# EAGLE board cable 2 (EAGLE 7.6.0)
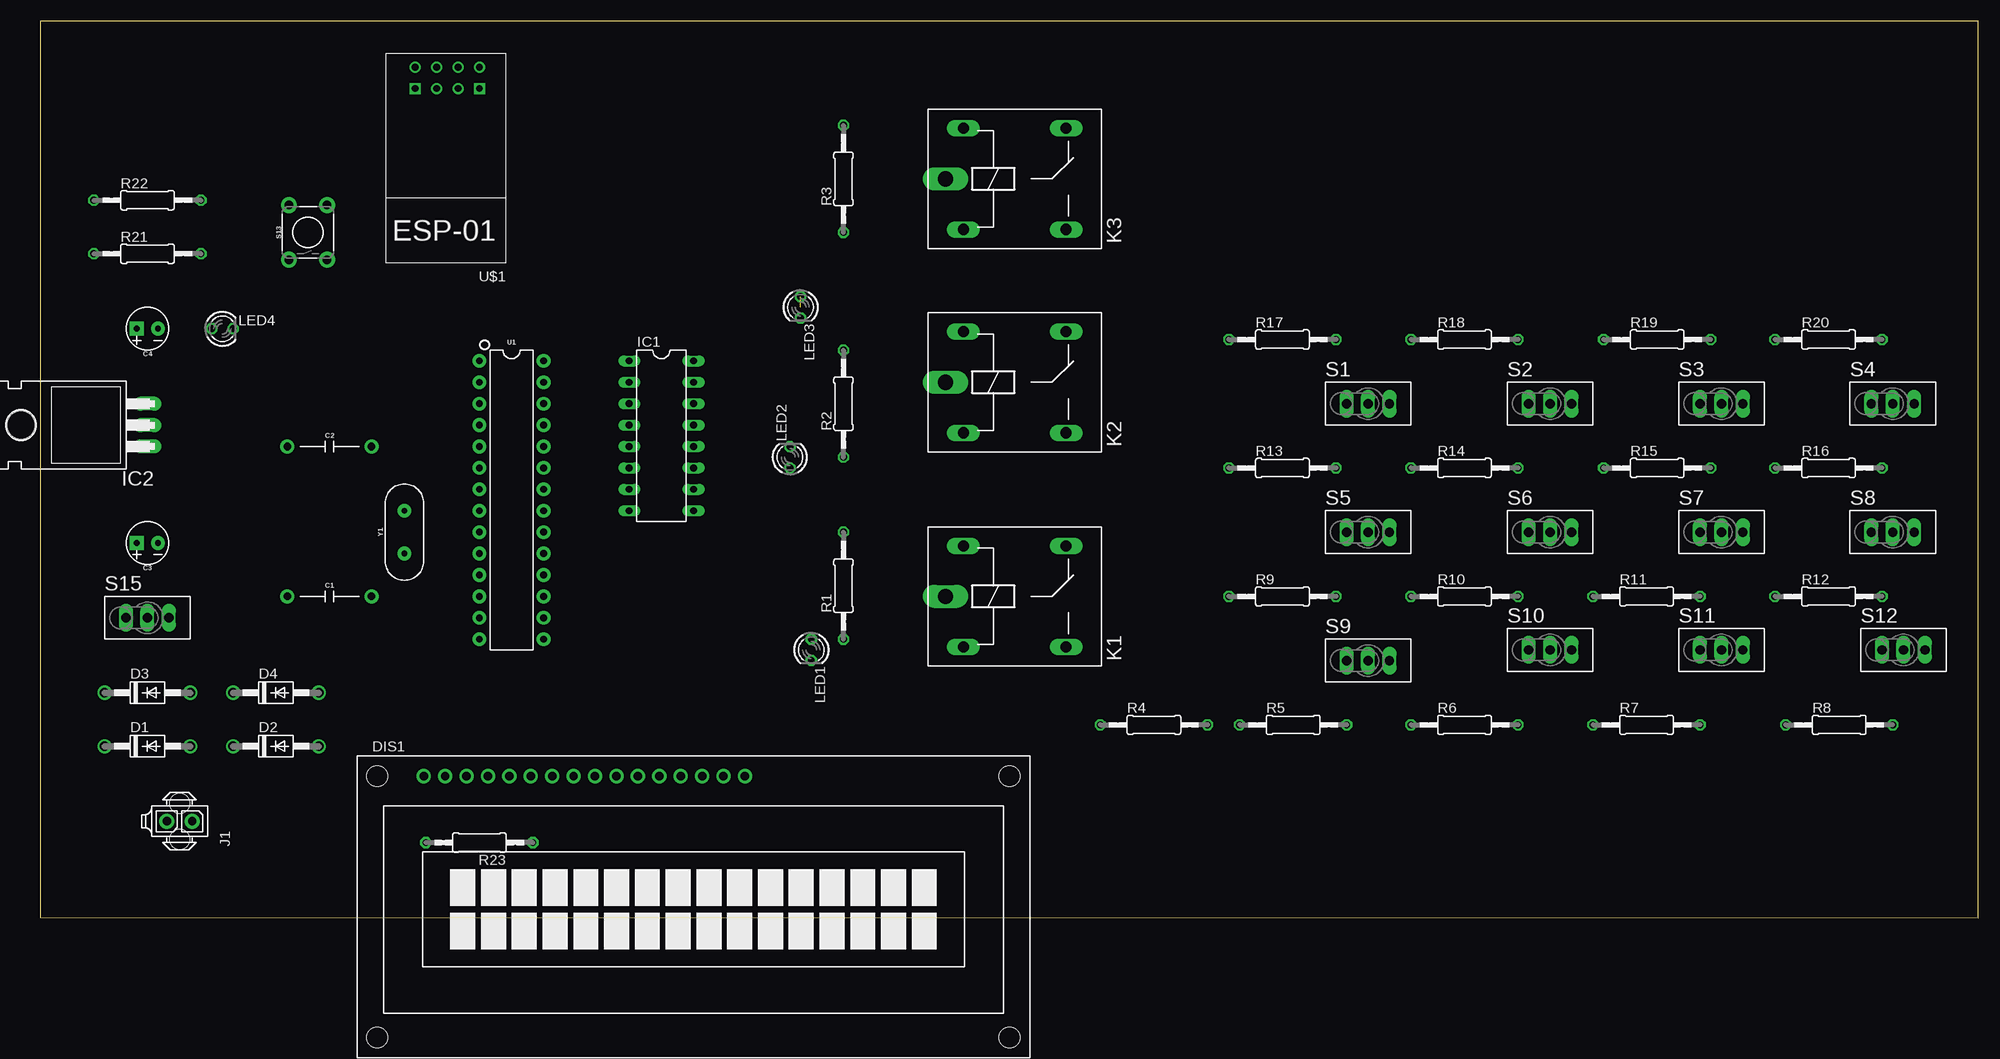
[diagram p0: board, top side]
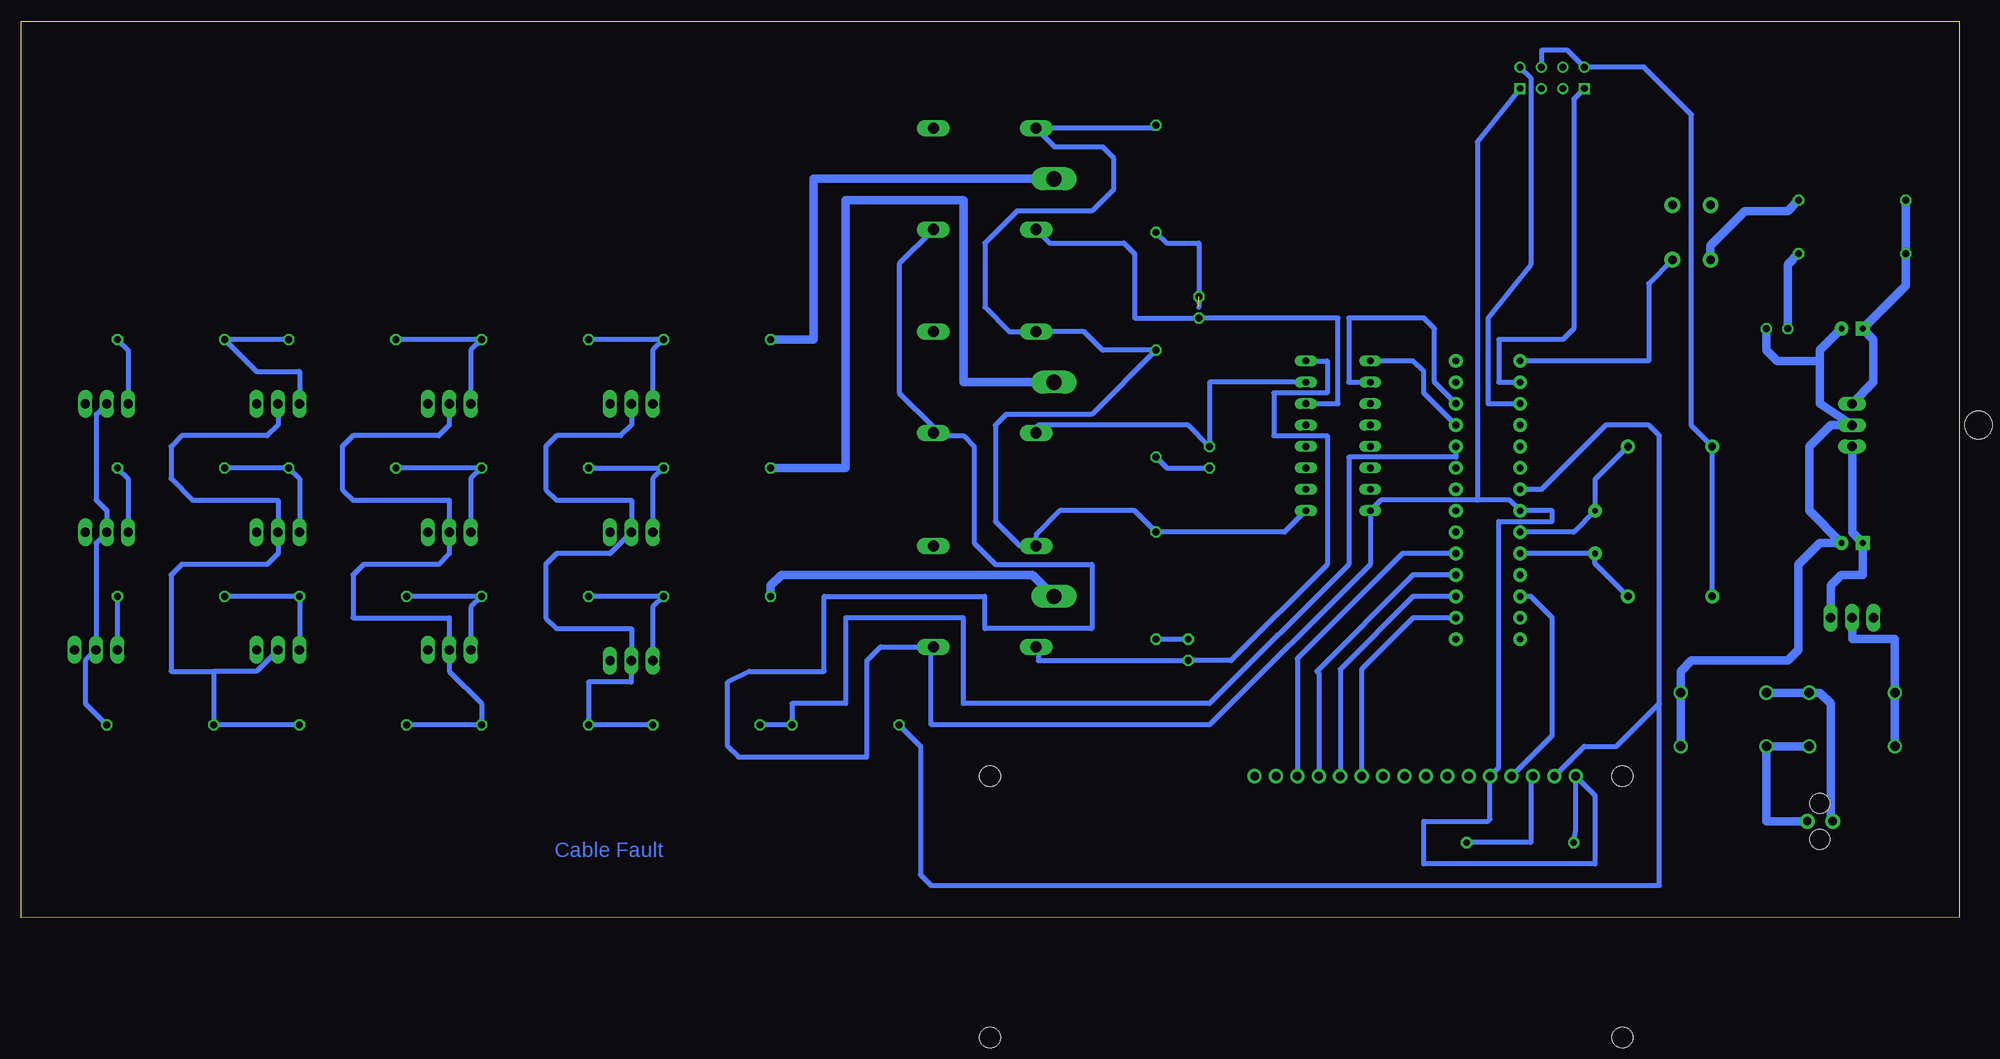
[diagram p1: board, bottom side, seen from below]

Size 229.87 x 106.37 mm. Coordinates in mm from the lower left corner, seen from the top.
Outline: 0,0.02 229.87,0 229.85,106.37 0,106.37 0,0.02
Copper layers (1*16): Top 0.035mm / dielectric 1.5mm / Bottom 0.035mm
Design rules "default": minimum track width 10mil, minimum drill 24mil, track to track 8mil, track to pad 8mil, pad to pad 8mil, via to via 8mil, smd to smd 8mil, copper to edge 40mil, drill to drill 8mil, minimum pad ring 10mil, minimum via ring 8mil, stop-mask expansion 4mil, vias tented up to drill 0mil, thermal gap 10mil

## Footprints (pad centres in the part's own frame; a part is rotated, then mirrored left to right if it is on the bottom)
CAP-PTH-10MM = drill 0.9 pad 1.651: 1 -5,0; 2 5,0
CPOL-RADIAL-2.5MM-5MM-KIT = drill 0.7 pad 1.651 square: 1 1.25,0 | drill 0.7 pad 1.651: 2 -1.25,0
DO41-10 = drill 1.118: A 5.08,0; C -5.08,0
TUXGR_16X2_R2 = drill 1 pad 1.676: 1 -32,15.5; 2 -29.46,15.5; 3 -26.92,15.5; 4 -24.38,15.5; 5 -21.84,15.5; 6 -19.3,15.5; 7 -16.76,15.5; 8 -14.22,15.5; 9 -11.68,15.5; 10 -9.14,15.5; 11 -6.6,15.5; 12 -4.06,15.5; 13 -1.52,15.5; 14 1.02,15.5; 15 3.56,15.5; 16 6.1,15.5 | hole 2.5: -37.5,-15.5; 37.5,-15.5; -37.5,15.5; 37.5,15.5
DIL16 = drill 0.813 long: 1 -8.89,-3.81; 2 -6.35,-3.81; 3 -3.81,-3.81; 4 -1.27,-3.81; 5 1.27,-3.81; 6 3.81,-3.81; 7 6.35,-3.81; 8 8.89,-3.81; 9 8.89,3.81; 10 6.35,3.81; 11 3.81,3.81; 12 1.27,3.81; 13 -1.27,3.81; 14 -3.81,3.81; 15 -6.35,3.81; 16 -8.89,3.81
TO220H = drill 1.118 long: 1 -2.54,-10.16; 2 0,-10.16; 3 2.54,-10.16 | hole 3.302: 0,4.826
794681-2 = drill 1 pad 1.778: 1 0,-1.5; 2 0,1.5 | hole 2.4: 2.13,0; -2.17,0
ZF112 = drill 1.321 long: 1 -6.096,5.994; 2 -6.096,-5.994; O 6.096,5.994; S 6.096,-5.994 | drill 1.803 long: P -8.204,0
LED3MM = drill 0.813 octagon: A -1.27,0; K 1.27,0
0207/12 = drill 0.813 octagon: 1 -6.35,0; 2 6.35,0
TL3XPO = drill 1.1 pad 1.422 long: 1 -2.54,0; 2 0,0; 3 2.54,0
TACTILE_SWITCH_PTH_6.0MM_KIT = drill 1.016 pad 1.88: 1 -3.251,2.261; 2 3.251,2.261; 3 -3.251,-2.261; 4 3.251,-2.261
DIP28 = drill 0.813 pad 1.626: 1 -16.51,-3.81; 2 -13.97,-3.81; 3 -11.43,-3.81; 4 -8.89,-3.81; 5 -6.35,-3.81; 6 -3.81,-3.81; 7 -1.27,-3.81; 8 1.27,-3.81; 9 3.81,-3.81; 10 6.35,-3.81; 11 8.89,-3.81; 12 11.43,-3.81; 13 13.97,-3.81; 14 16.51,-3.81; 15 16.51,3.81; 16 13.97,3.81; 17 11.43,3.81; 18 8.89,3.81; 19 6.35,3.81; 20 3.81,3.81; 21 1.27,3.81; 22 -1.27,3.81; 23 -3.81,3.81; 24 -6.35,3.81; 25 -8.89,3.81; 26 -11.43,3.81; 27 -13.97,3.81; 28 -16.51,3.81
ESP01 = drill 0.8: CH_PD -1.285,-8.178; GPIO0 1.255,-5.638; GPIO2 -1.285,-5.638; RST 1.255,-8.178; TX -3.825,-8.178; VCC 3.795,-8.178 | drill 0.8 square: GND -3.825,-5.638; RX 3.795,-5.638
HC49US = drill 0.7 pad 1.651: 1 -2.54,0; 2 2.54,0

## Placement (x,y rotation side)
C1  10nF  [CAP-PTH-10MM]  34.29,38.12 0 top
C2  10nF  [CAP-PTH-10MM]  34.29,55.9 0 top
C3  10uF  [CPOL-RADIAL-2.5MM-5MM-KIT]  12.7,44.47 180 top
C4  10uF  [CPOL-RADIAL-2.5MM-5MM-KIT]  12.7,69.87 180 top
D1  1N4004  [DO41-10]  12.7,20.34 0 top
D2  1N4004  [DO41-10]  27.94,20.34 0 top
D3  1N4004  [DO41-10]  12.7,26.69 0 top
D4  1N4004  [DO41-10]  27.94,26.69 0 top
DIS1  TUXGR_16X2_R2  [TUXGR_16X2_R2]  77.47,1.29 0 top
IC1  ULN2004AN  [DIL16]  73.66,57.17 270 top
IC2  7812T  [TO220H]  2.54,58.44 90 top
J1  794681-2  [794681-2]  16.51,11.45 90 top
K1  ZF112  [ZF112]  115.57,38.12 0 top
K2  ZF112  [ZF112]  115.57,63.52 0 top
K3  ZF112  [ZF112]  115.57,87.65 0 top
LED1  TLLR4400  [LED3MM]  91.44,31.77 270 top
LED2  TLLR4400  [LED3MM]  88.9,54.63 90 top
LED3  TLLR4400  [LED3MM]  90.17,72.41 270 top
LED4  TLLR4400  [LED3MM]  21.59,69.87 0 top
R1  [0207/12]  95.25,39.39 90 top
R2  [0207/12]  95.25,60.98 90 top
R3  [0207/12]  95.25,87.65 90 top
R4  [0207/12]  132.08,22.88 0 top
R5  [0207/12]  148.59,22.88 0 top
R6  [0207/12]  168.91,22.88 0 top
R7  [0207/12]  190.5,22.88 0 top
R8  [0207/12]  213.36,22.88 0 top
R9  [0207/12]  147.32,38.12 0 top
R10  [0207/12]  168.91,38.12 0 top
R11  [0207/12]  190.5,38.12 0 top
R12  [0207/12]  212.09,38.12 0 top
R13  [0207/12]  147.32,53.36 0 top
R14  [0207/12]  168.91,53.36 0 top
R15  [0207/12]  191.77,53.36 0 top
R16  [0207/12]  212.09,53.36 0 top
R17  [0207/12]  147.32,68.6 0 top
R18  [0207/12]  168.91,68.6 0 top
R19  [0207/12]  191.77,68.6 0 top
R20  [0207/12]  212.09,68.6 0 top
R21  [0207/12]  12.7,78.76 0 top
R22  [0207/12]  12.7,85.11 0 top
R23  [0207/12]  52.07,8.91 180 top
S1  TL36PO  [TL3XPO]  157.48,60.98 0 top
S2  TL36PO  [TL3XPO]  179.07,60.98 0 top
S3  TL36PO  [TL3XPO]  199.39,60.98 0 top
S4  TL36PO  [TL3XPO]  219.71,60.98 0 top
S5  TL36PO  [TL3XPO]  157.48,45.74 0 top
S6  TL36PO  [TL3XPO]  179.07,45.74 0 top
S7  TL36PO  [TL3XPO]  199.39,45.74 0 top
S8  TL36PO  [TL3XPO]  219.71,45.74 0 top
S9  TL36PO  [TL3XPO]  157.48,30.5 0 top
S10  TL36PO  [TL3XPO]  179.07,31.77 0 top
S11  TL36PO  [TL3XPO]  199.39,31.77 0 top
S12  TL36PO  [TL3XPO]  220.98,31.77 0 top
S13  MOMENTARY-SWITCH-SPST-PTH-6.0MM-KIT  [TACTILE_SWITCH_PTH_6.0MM_KIT]  31.75,81.3 90 top
S15  TL37PO  [TL3XPO]  12.7,35.58 0 top
U1  328P  [DIP28]  55.88,49.55 270 top
U$1  ESP01  [ESP01]  48.26,92.73 180 top
Y1  16MHz  [HC49US]  43.18,45.74 90 top

## Library data of the parts
C1 C2 = SparkFun-Capacitors; PROD_ID: CAP-09321
C3 C4 = SparkFun-Capacitors; PROD_ID: CAP-08440
D1-D4 = diode
DIS1 = display-lcd; OC_FARNELL: unknown; OC_NEWARK: unknown
IC1 = uln-udn
IC2 = linear
J1 = con-amp
K1-K3 = relay; OC_FARNELL: unknown; OC_NEWARK: unknown
LED1-LED4 = led; MF: VISHAY SEMICONDUCTOR; OC_FARNELL: 1612437
R1-R23 = rcl
S1-S12 S15 = switch
S13 = SparkFun-Switches; PROD_ID: SWCH-08441; SF_SKU: COM-00097
U1 = SparkFun-IC-Microcontroller; PROD_ID: IC-09136
U$1 = esp8266modules
Y1 = SparkFun-Clocks; PROD_ID: XTAL-08181; SF_ID: COM-00536

## Nets
3.3V: C1.1 C2.1 U$1.CH_PD U$1.VCC
5V: DIS1.2 R4.1 U1.7
12V: IC1.9 K1.1 K2.1 K3.1 R1.2 R2.2 R3.2
GND: DIS1.1 DIS1.5 IC1.8 K1.S K2.S K3.S R23.2 U1.8 U$1.GND
N$1: DIS1.3 R23.1
N$2: R16.2 S8.1
N$3: C2.2 U1.9 Y1.2
N$4: C1.2 U1.10 Y1.1
N$5: LED4.A R21.2
N$6: C3.2 C4.2 D2.A D4.A IC2.2 LED4.K
N$7: C4.1 IC2.3 R21.1 R22.1
N$8: R22.2 S13.1
N$9: S13.3 U1.1
N$10: D3.A D4.C J1.2
N$11: C3.1 IC2.1 S15.3
N$12: U1.3 U$1.TX
N$13: DIS1.11 U1.16
N$14: DIS1.12 U1.17
N$15: DIS1.13 U1.18
N$16: U1.2 U$1.RX
N$17: DIS1.14 U1.19
N$18: DIS1.6
N$19: DIS1.4 U1.12
N$20: LED1.A R1.1
N$21: IC1.16 K1.2 LED1.K
N$22: IC1.15 K2.2 LED2.K
N$23: LED2.A R2.1
N$24: IC1.14 K3.2 LED3.K
N$25: LED3.A R3.1
N$26: IC1.1 U1.25
N$27: IC1.2 U1.26
N$28: K1.P R9.1
N$29: R4.2 R5.1 U1.24
N$30: R8.2 S4.2 S8.2 S12.2
N$31: R5.2 R6.1 S1.2 S5.2 S9.2
N$32: K2.P R13.1
N$33: K3.P R17.1
N$34: R17.2 R18.1 S1.1
N$35: R18.2 R19.1 S2.1
N$36: R19.2 R20.1 S3.1
N$37: R13.2 R14.1 S5.1
N$38: R14.2 R15.1 S6.1
N$39: R15.2 R16.1 S7.1
N$40: R9.2 R10.1 S9.1
N$41: R10.2 R11.1 S10.1
N$42: R11.2 R12.1 S11.1
N$43: R6.2 R7.1 S2.2 S6.2 S10.2
N$44: R7.2 R8.1 S3.2 S7.2 S11.2
N$45: R20.2 S4.1
N$47: R12.2 S12.1
N$48: IC1.3
N$49: D1.C D3.C S15.2
N$50: D1.A D2.C J1.1

## Tracks (layer width: path | path; a pad name or v marks a point on that pad's centre or on a via)
3.3V
  Bottom 0.61: C1.1 C2.1 31.75,58.36 31.75,95.27 37.39,100.91 U$1.VCC 46.45,102.89 49.53,102.89 49.55,102.88 U$1.CH_PD
5V
  Bottom 0.61: DIS1.2 44.46,20.34 40.64,20.34 35.56,25.42 | 35.56,25.42 35.56,57.17 36.83,58.44 41.91,58.44 49.53,50.82 U1.7 | R4.1 123.19,20.34 123.19,5.1 121.92,3.83 35.56,3.83 35.56,25.42
12V
  Bottom 0.61: R3.2 95.61,93.64 K3.1 107.29,91.46 101.6,91.46 100.33,90.19 100.33,86.38 102.87,83.84 111.76,83.84 115.57,80.03 115.57,72.41 112.67,69.51 K2.1 103.78,69.51 101.6,67.33 R2.2 102.87,59.71 113.03,59.71 114.3,58.44 114.3,47.01 111.4,44.11 K1.1 109.47,45.49 106.68,48.28 97.79,48.28 R1.2 80.01,45.74 IC1.9
GND
  Bottom 0.61: R23.2 45.47,10.43 DIS1.1 43.18,14.5 43.18,6.37 63.5,6.37 63.5,11.45 55.88,11.45 55.63,11.7 DIS1.5 54.61,17.81 54.61,47.01 48.26,47.01 48.26,48.28 U1.8 53.34,49.55 57.15,49.55 | 57.15,49.55 68.58,49.55 IC1.8 69.85,41.93 88.9,22.88 121.92,22.88 121.92,31.77 121.67,32.02 K1.S 127.91,32.13 129.54,30.5 129.54,19.07 144.78,19.07 146.05,20.34 146.05,27.96 143.51,29.23 134.62,29.23 134.62,38.12 115.57,38.12 115.57,34.31 102.87,34.31 102.87,41.93 114.3,41.93 116.84,44.47 116.84,55.9 118.11,57.17 121.31,57.17 K2.S 121.67,58.19 125.73,62.25 125.73,77.59 K3.S | U$1.GND 57.15,92.03 57.15,49.55
N$1
  Bottom 0.61: DIS1.3 50.8,16.54 50.8,8.91 R23.1
N$2
  Bottom 0.61: R16.2 217.17,52.09 S8.1
N$3
  Bottom 0.61: C2.2 43.18,52.01 Y1.2 45.72,45.74 U1.9
N$4
  Bottom 0.61: C1.2 43.18,42.01 Y1.1 U1.10
N$5
  Bottom 1.016: R21.2 20.32,77.49 LED4.A
N$6
  Bottom 1.016: D2.A D4.A 33.02,29.23 31.75,30.5 20.32,30.5 19.05,31.77 19.05,41.93 16.51,44.47 C3.2 17.78,48.3 17.78,55.9 15.24,58.44 IC2.2 16.51,60.98 16.51,66.06 | 16.51,66.06 16.51,67.33 13.97,69.87 C4.2 | LED4.K 22.86,67.33 21.59,66.06 16.51,66.06
N$7
  Bottom 1.016: IC2.3 10.16,63.52 10.16,68.6 11.43,69.87 C4.1 6.35,74.97 R21.1 R22.1
N$8
  Bottom 1.016: R22.2 20.32,83.84 25.4,83.84 29.49,79.75 S13.1
N$9
  Bottom 0.61: S13.3 36.83,75.23 36.83,66.06 U1.1
N$10
  Bottom 1.016: J1.2 15.24,11.68 15.24,25.42 16.51,26.69 D3.A D4.C
N$11
  Bottom 1.016: S15.3 15.24,39.39 13.97,40.66 11.43,40.66 11.45,40.68 C3.1 12.7,45.72 IC2.1
N$12
  Bottom 0.61: U$1.TX 50.8,99.62 50.8,77.49 55.88,71.14 55.88,60.98 U1.3
N$13
  Bottom 0.61: U1.16 64.77,35.58 70.87,29.48 DIS1.11
N$14
  Bottom 0.61: U1.17 64.77,38.12 73.41,29.48 DIS1.12
N$15
  Bottom 0.61: U1.18 64.77,40.66 76.2,29.23 75.95,28.98 DIS1.13
N$16
  Bottom 0.61: U$1.RX 45.72,97.11 45.72,69.87 46.99,68.6 54.61,68.6 54.61,63.52 U1.2
N$17
  Bottom 0.61: U1.19 66.04,43.2 78.49,30.75 DIS1.14
N$19
  Bottom 0.61: DIS1.4 48.26,21.62 48.26,35.58 50.8,38.12 U1.12
N$20
  Bottom 0.61: R1.1 LED1.A
N$21
  Bottom 0.61: IC1.16 74.93,66.06 74.93,62.25 81.28,62.25 81.28,57.17 74.93,57.17 74.93,41.93 86.36,30.5 LED1.K 109.22,30.5 109.22,31.87 K1.2
N$22
  Bottom 0.61: IC1.15 88.9,63.52 LED2.K 91.44,58.44 109.22,58.44 109.47,58.19 K2.2
N$23
  Bottom 0.61: R2.1 93.98,53.36 LED2.A
N$24
  Bottom 0.61: K3.2 107.85,80.03 99.06,80.03 97.79,78.76 97.79,71.14 LED3.K 73.66,71.14 73.66,60.98 IC1.14
N$25  (1 unrouted)
  Bottom 0.61: R3.1 93.98,80.03 90.17,80.03 90.17,72.41
N$26
  Bottom 0.61: U1.25 63.5,62.25 63.5,64.79 64.77,66.06 IC1.1
N$27
  Bottom 0.61: U1.26 62.23,63.52 62.23,69.87 63.5,71.14 72.39,71.14 72.39,63.52 IC1.2
N$28
  Bottom 1.016: K1.P 109.91,40.66 139.7,40.66 140.97,39.39 R9.1
N$29
  Bottom 0.61: U1.24 59.69,54.63 72.39,54.63 72.39,41.93 88.9,25.42 118.11,25.42 118.11,35.58 132.08,35.58 132.08,25.42 138.43,25.42 R4.2 R5.1
N$30
  Bottom 0.61: S4.2 220.98,59.71 220.98,49.55 219.71,48.28 S8.2 220.98,44.47 S12.2 222.25,30.5 222.25,25.42 R8.2
N$31
  Bottom 0.61: S1.2 157.48,58.44 158.75,57.17 166.37,57.17 167.64,55.9 167.64,50.82 166.37,49.55 157.48,49.55 S5.2 160.02,43.2 166.37,43.2 167.64,41.93 167.64,35.58 166.37,34.31 157.48,34.31 S9.2 157.48,27.96 162.56,27.96 R6.1 R5.2
N$32
  Bottom 1.016: K2.P 118.11,63.52 118.11,85.11 132.08,85.11 132.08,53.36 R13.1
N$33
  Bottom 1.016: K3.P 135.89,87.65 135.89,68.6 R17.1
N$34
  Bottom 0.61: R18.1 R17.2 154.94,67.33 S1.1
N$35
  Bottom 0.61: R19.1 R18.2 176.53,67.33 S2.1
N$36
  Bottom 0.61: R19.2 R20.1 201.93,64.79 196.85,64.79 S3.1
N$37
  Bottom 0.61: S5.1 154.94,52.09 R13.2 R14.1
N$38
  Bottom 0.61: R15.1 R14.2 176.53,52.09 S6.1
N$39
  Bottom 0.61: R16.1 R15.2 196.85,52.09 S7.1
N$40
  Bottom 0.61: R10.1 R9.2 154.94,36.85 S9.1
N$41
  Bottom 0.61: R11.1 R10.2 176.53,36.85 S10.1
N$42
  Bottom 0.61: R12.1 R11.2 S11.1
N$43
  Bottom 0.61: S2.2 179.07,58.44 180.34,57.17 190.5,57.17 191.77,55.9 191.77,50.82 190.5,49.55 179.07,49.55 S6.2 179.07,43.2 180.34,41.93 189.23,41.93 190.5,40.66 190.5,35.58 179.07,35.58 S10.2 179.07,29.23 175.26,25.42 R6.2 R7.1
N$44
  Bottom 0.61: S3.2 199.39,58.44 200.66,57.17 210.82,57.17 212.09,55.9 212.09,52.09 209.55,49.55 199.39,49.55 S7.2 199.39,43.2 200.66,41.93 210.82,41.93 212.09,40.66 212.09,29.23 207.01,29.23 | 207.01,29.23 R8.1 R7.2 | S11.2 201.93,29.23 207.01,29.23
N$45
  Bottom 0.61: R20.2 217.17,67.33 S4.1
N$47
  Bottom 0.61: R12.2 S12.1 218.44,30.5
N$49
  Bottom 1.016: S15.2 12.7,33.04 7.62,33.04 D3.C D1.C
N$50
  Bottom 1.016: J1.1 22.86,11.45 D2.C D1.A

## Text on the board
Bottom: Cable Fault